# Altium PCB FTDI Breakout.PcbDoc
Units mil, origin at the board's own origin, x right, y up, seen from the top; angles counter-clockwise.
Board outline 254 x 613 mil, 2 copper layers (Top Layer, Bottom Layer), stack 61.756 mil thick; 1 components, 6 nets, 6 pads, 0 vias.
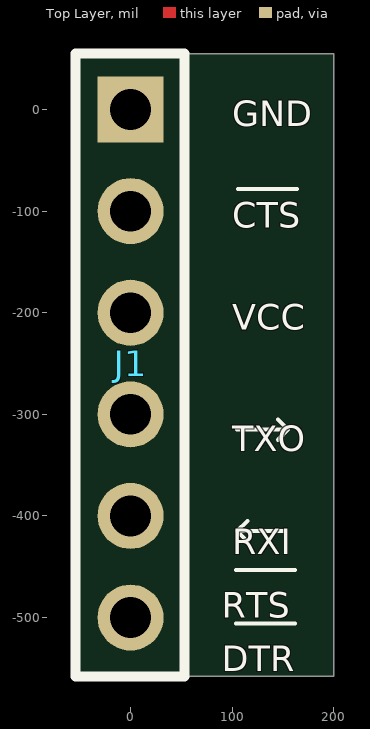
[diagram p0: Top Layer view]
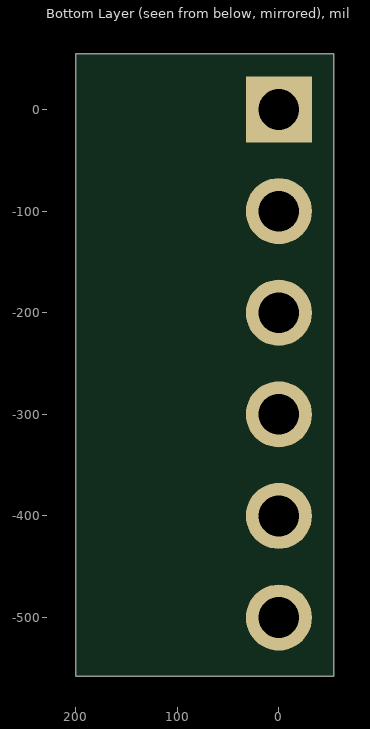
[diagram p1: Bottom Layer view, seen from below]

## Layer stack, top to bottom
Top Solder: solder mask 1, PSR-4000BN, Dk 4.5
Top Layer: signal copper 1.378
Dielectric 1: core 59, Kingboard KB6167F, Dk 4.5
Bottom Layer: signal copper 1.378
Bottom Solder: solder mask 1, PSR-4000BN, Dk 4.5

## Board outline
-54,-558 -54,55 200,55 200,-558

## Design rules (kind name [scope] priority, off if disabled: settings)
BoardOutlineClearance [All] p1: gap=7.87 ignorepadtopadclearanceinfootprint=FALSE
Clearance [All] p1: gap=5 ignorepadtopadclearanceinfootprint=FALSE except(9.84: Arc-Hole Track-Hole SMDPad-Hole THPad-Hole Via-Hole Fill-Hole Poly-Hole Region-Hole Text-Hole)
ComponentClearance [All] p1 off: gap=5 collisioncheckmode=3 verticalgap=5 showdistances=TRUE
DiffPairsRouting [All] p1: maxlimit=10 minlimit=5 mostfreqgap=5 toplayer_minwidth=5 toplayer_maxwidth=1000 toplayer_prefwidth=5 bottomlayer_minwidth=5 bottomlayer_maxwidth=1000 bottomlayer_prefwidth=5 maxuncoupledlength=500
Height [All] p1: minheight=0 maxheight=71497.94 prefheight=500
HoleSize [All] p1: absolutevalues=TRUE maxlimit=248.03 minlimit=11.81 maxpercent=80.000 minpercent=20.000
HoleToHoleClearance [All] p1: gap=9.84 allowstackedmicrovias=FALSE
MinimumAnnularRing [All] p1: minimumring=3
MinimumSolderMaskSliver [All] p1: minsoldermaskwidth=0
PlaneClearance [All] p1: clearance=5
PlaneConnect PlaneConnectPowerPads [InPadClass('PowerPads')] p1: planeconnectstyle=Direct reliefexpansion=20 reliefentries=4 reliefconductorwidth=10 reliefairgap=10
PlaneConnect [All] p2: pad.planeconnectstyle=Relief pad.reliefexpansion=11.81 pad.reliefentries=4 pad.reliefconductorwidth=5 pad.reliefairgap=5 via.planeconnectstyle=Direct via.reliefexpansion=11.81 via.reliefentries=4 via.reliefconductorwidth=5 via.reliefairgap=5
PolygonConnect PolygonConnectPowerPads [All vs (InPadClass('PowerPads'))] p1: connectstyle=Direct reliefconductorwidth=10 reliefentries=4 polygonreliefangle="90 Angle" airgapwidth=10
PolygonConnect [All] p2: thpad.connectstyle=Relief thpad.reliefconductorwidth=5 thpad.reliefentries=4 thpad.polygonreliefangle="90 Angle" thpad.airgapwidth=5 smdpad.connectstyle=Relief smdpad.reliefconductorwidth=5 smdpad.reliefentries=4 smdpad.polygonreliefangle="90 Angle" smdpad.airgapwidth=5 via.connectstyle=Direct via.reliefconductorwidth=5 via.reliefentries=4 via.polygonreliefangle="90 Angle" via.airgapwidth=5
RoutingVias [All] p1: holewidth=11.81 width=23.62 viastyle="Through Hole" minholewidth=11.81 minwidth=23.62 maxholewidth=23.62 maxwidth=259.84
SilkToSilkClearance [All] p1: silktosilkclearance=0
SilkToSolderMaskClearance [IsPad] p1: minsilkscreentomaskgap=5 clearancetoexposedcopper=TRUE
SolderMaskExpansion [All] p1: expansion=2.95 istentingtop=FALSE
Width [All] p1: maxlimit=1000 minlimit=5 preferedwidth=5 minimp=50.000000 maximp=50.000000 favimp=50.000000
20 further rules are at their usual default settings.

## Components (designator, comment, footprint, x,y, rotation, side; value= is the part's Value field where it differs from the comment)
J1 "6 contacts stacking Male header" PRPC006SACN-RC 0,0 r270 top

## Footprints (in the part's own frame and the unit in brackets; to place one, negate y for a bottom-side part, rotate by r counter-clockwise, add the part's x,y. Pads: shape width x height; smd on the part's side, far side on the other; paste and mask are expansions set on the pad)
PRPC006SACN-RC [mil]
  rect 65x65 hole 40: 1(0,0)
  round 65 hole 40: 2(100,0) 3(200,0) 4(300,0) 5(400,0) 6(500,0)
  silkscreen extent -55,-54 558,53, body extent -50,-50 550,50, height 328

## Part data
J1: library part PRPC006SACN-RC, "Connector Male Header 1X6 vertical 6contacts 0.100in pitch Gold finish THT Stacking", Manufacturer="Sullins Connector Solutions", PCB Package="1X6 THT", Supplier Part Number 1=S1131EC-06-ND, ComponentLink1Description="Manufacturer Website", ComponentLink1URL=http://www.sullinscorp.com, ComponentLink2Description="Component Datasheet", ComponentLink2URL=https://media.digikey.com/PDF/Data%20Sheets/Sullins%20PDFs/xRxCzzzSxxN-RC_ST_11635-B.pdf, ComponentLink3Description="Octopart Link", ComponentLink3URL=https://octopart.com/prpc006sacn-rc-sullins-22265644?r=sp, ComponentLink4Description="Product Page", ComponentLink4URL=https://www.sullinscorp.com/product/?pn=PRPC006SACN-RC&toggle=in, Contact Finish=Gold, Description in Visual="Con Hdr Male 6contacts vertical 1X6 stack", Gender=Male, Manufacturer P/N=PRPC006SACN-RC, Number of Contacts=6, Number of Rows=1, Options="Contact length: 0.648\"", Orientation=vertical, P/N=PRPC006SACN-RC, Pitch=0.100in, Supplier 1=Digi-Key, Supplier 2=TSW-106-22-T-S-RE-ND, Supplier Part Number 2=Digi-Key

## Nets (pads, with @x,y where several pads share a name; then routed paths per layer and width w, separated by ;. In a path a pad name is that pad's centre, name@x,y a point inside that pad or via, vN(x,y) a via of type N, cw(c..) or ccw(c..) an arc to the next point about the centre after c; other vN are vias at no path point)
\CTS: J1.2
\RTSDTR: J1.6
GND: J1.1
RxI: J1.5
TxO: J1.4
VCC: J1.3

## Silkscreen, mask and mechanical layers (free items; w line width, h text height)
Top Overlay:
  lines w4: 104,-506 162,-506 ; 104,-453 162,-453 ; 105,-315 155,-315 ; 105.95,-78.38 163.95,-78.38 ; 115,-425 105,-415 ; 115,-405 105,-415 ; 145,-325 155,-315 ; 145,-305 155,-315 ; 150,-415 105,-415
  text "GND" at 100,-16.5 h25
  text "CTS" at 100,-116.5 h25
  text "VCC" at 100,-216.5 h25
  text "TXO" at 100,-336.29 h25
  text "RXI" at 100,-437.48 h25
  text "RTS" at 90,-500 h25
  text "DTR" at 90,-552.99 h25
Board Outline:
  the board outline again, w2
CAM Title Block:
  drawing of 59 lines, arcs and shapes, not listed
  text "1" at -964.29,5061.6 h48.36
  text "2" at 1778.83,5061.6 h48.36
  text "3" at 4531.96,5061.6 h48.36
  text "4" at 7277.58,5061.6 h48.36
  text "A" at -2237.46,4099.46 h48.36
  text "A" at 8563.26,4099.46 h48.36
  text "B" at -2232.46,1974.25 h48.36
  text "B" at 8567.43,1974.25 h48.36
  text "C" at -2233.3,-150.12 h48.36
  text "C" at 8566.6,-150.12 h48.36
  text "D" at -2235.8,-2275.33 h48.36
  text "D" at 8564.1,-2275.33 h48.36
  text "Title:" at 4974.69,-2356.2 h65.87
  text "'.Pcb_File_Name_No_Path'" at 5324.88,-2377.32 h63.36
  text "*" at 5224.83,-2470.42 h32.52
  text "*" at 5224.83,-2530.45 h32.52
  text "Desc:" at 4974.69,-2542.96 h42.52
  text "*" at 5224.83,-2590.48 h32.52
  text "Letter" at 5174.8,-2738.06 h42.52
  text "Auth:" at 5575.01,-2738.06 h42.52
  text "Proj:" at 6674.76,-2738.06 h42.52
  text "Size:" at 4974.69,-2743.06 h42.52
  text ".ProjAuth" at 5824.65,-2760 h42.52
  text ".ProjShrtName" at 6875,-2760 h42.52
  text "1" at 6974.92,-2877.71 h37.52
  text "1" at 7275.08,-2877.71 h37.52
  text "Date:" at 4974.69,-2883.96 h37.52
  text "'.ModifiedDate'" at 5224.83,-2883.96 h37.52
  text "Time:" at 5975.22,-2883.96 h37.52
  text "'.ModifiedTime'" at 6185.34,-2883.96 h37.52
  text "Sheet" at 6674.76,-2883.96 h37.52
  text "of" at 7125,-2883.96 h37.52
  text "Repo:" at 4974.69,-2974 h37.52
  text ".ProjGitURL" at 5225,-2975 h37.52
  text "File:" at 4974.69,-3074.05 h37.52
  text "'.Pcb_File_Name'" at 5224.83,-3074.05 h37.52
  text "1" at -964.29,-3237.47 h48.36
  text "2" at 1778.83,-3237.47 h48.36
  text "3" at 4531.96,-3237.47 h48.36
  text "4" at 7277.58,-3237.47 h48.36